# Altium PCB DAC8830V1.0.pcbdoc
Units mil, origin at the board's own origin, x right, y up, seen from the top; angles counter-clockwise.
Board outline 6000 x 4000 mil, 2 copper layers (Top Layer, Bottom Layer); 32 components, 18 nets, 91 pads, 83 vias.
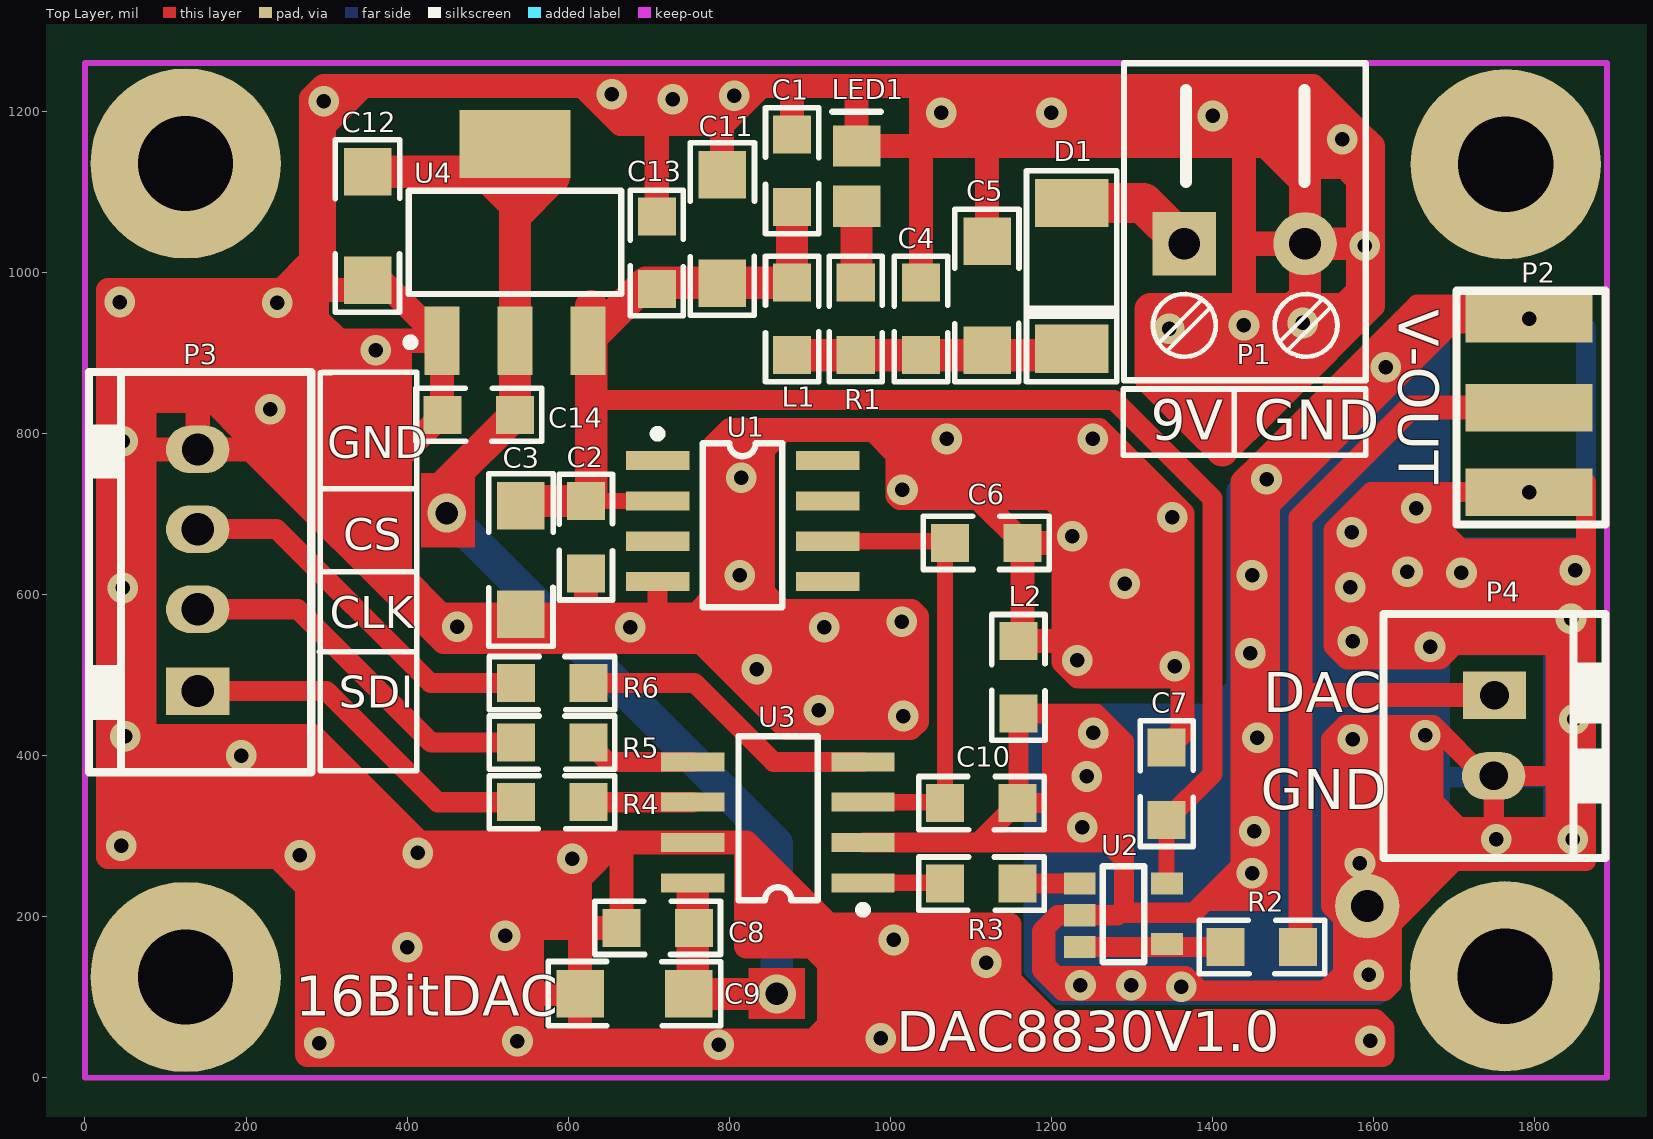
[diagram p0: Top Layer view]
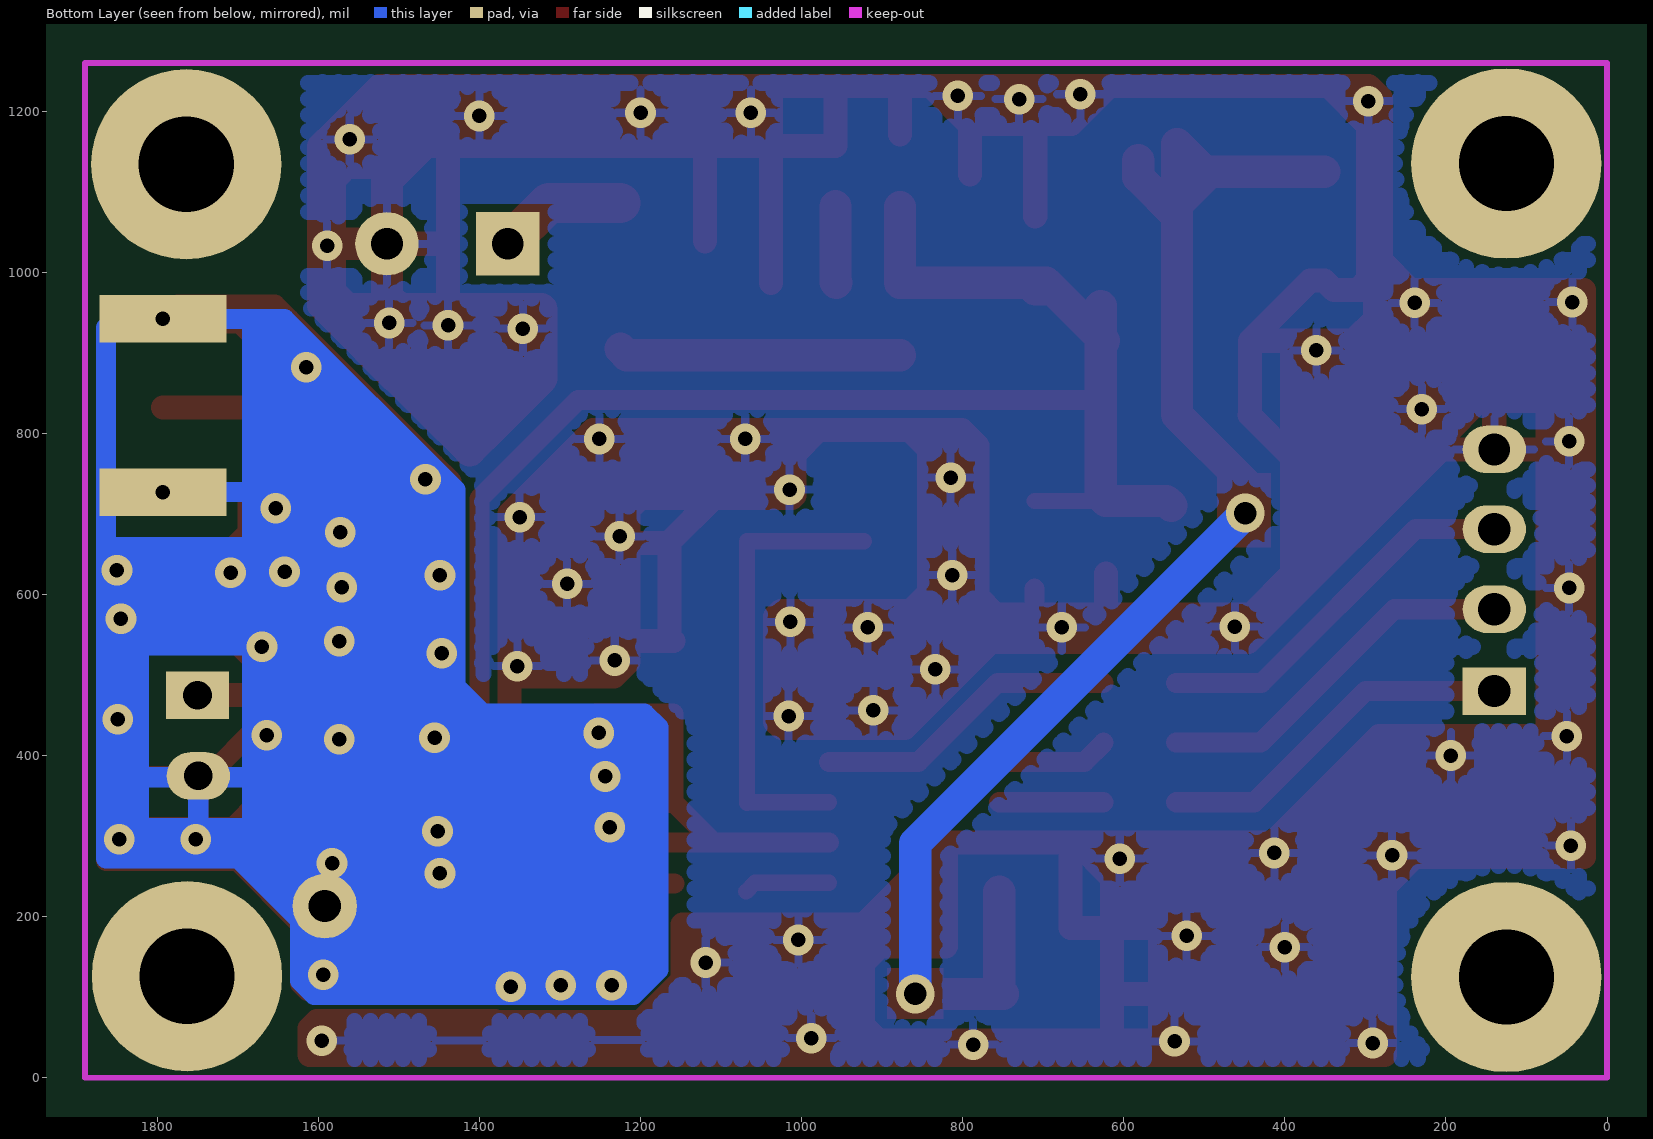
[diagram p1: Bottom Layer view, seen from below]

## Layer stack, top to bottom
Top Solder: solder mask 0.4, Solder Resist, Dk 3.5
Top Layer: signal copper 1.4
Dielectric 1: dielectric 12.6, FR-4, Dk 4.8
Bottom Layer: signal copper 1.4
Bottom Solder: solder mask 0.4, Solder Resist, Dk 3.5

## Board outline
-1385,-1985 4615,-1985 4615,2015 -1385,2015

## Design rules (kind name [scope] priority, off if disabled: settings)
Clearance [All] p1: gap=10
ComponentClearance [All] p1 off: gap=10 collisioncheckmode=3 verticalgap=10 showdistances=FALSE
PolygonConnect [All] p1: connectstyle=Relief reliefconductorwidth=10 reliefentries=4 polygonreliefangle="90 Angle" airgapwidth=10
RoutingVias [All] p1: holewidth=28 width=50 viastyle="Through Hole" minholewidth=28 minwidth=50 maxholewidth=28 maxwidth=50
SilkToBoardRegionClearance [All] p1 off:
SilkToSilkClearance [All] p1 off: silktosilkclearance=10
SilkToSolderMaskClearance [IsPad] p1 off: minsilkscreentomaskgap=10 clearancetoexposedcopper=TRUE
SolderMaskExpansion [All] p1: expansion=4
Width [All] p1: maxlimit=100 minlimit=10 preferedwidth=10 minimp=50.000000 maximp=50.000000 favimp=50.000000
26 further rules are at their usual default settings.

## Components (designator, comment, footprint, x,y, rotation, side; value= is the part's Value field where it differs from the comment)
C1 "0.1uF" 0805 878,1081 r90 top
C2 "0.1u" 0805 622,716 r270 top
C3 "10u/16V" 1206 541,710 r270 top
C4 "0.1uF" 0805 1038,987 r270 top
C5 "10u/25V" 1206 1120,903.6 r90 top
C6 "0.1u" 0805 1074,664 r0 top
C7 "0.1uF" 0805 1343,410 r270 top
C8 "0.1uF" 0805 666,186 r0 top
C9 "10uF" 1206 615,104 r0 top
C10 "0.1u" 0805 1068,341 r0 top
C11 "10uF" 1206 791,1121 r270 top
C12 "10uF" 1206 351,990 r90 top
C13 "0.1uF" 0805 710,1069 r270 top
C14 "0.1uF" 0805 444,823 r0 top
D1 "1N5817" "二极管 贴片 2010" 1225,1086 r270 top
L1 "磁珠" 0805 878,897 r90 top
L2 "磁珠" 0805 1159,542 r270 top
LED1 "红色" LED0805 958,1082 r90 top
P1 "KF127S-3.81-2P" KF127S-3.81-2P 1290,866 r0 top
P2 "SMA" "天线座 50ohm 侧卧" 1793,832 r180 top
P3 "XH2.54-4" VH2.54_4 140,480 r270 top
P4 "XH2.54-2" VH2.54_2 1750,475 r90 top
R1 "10K" 0805 957,987 r270 top
R2 "0" 0805 1416.26,162.26 r0 top
R3 "0" 0805 1158,241 r180 top
R4 "10" 0805 625,342 r180 top
R5 "10" 0805 625,416 r180 top
R6 "10" 0805 625,490 r180 top
U1 "REF02" SOIC8 711,766 r270 top
U2 "LMV321" SOT23-5 1235,241 r0 top
U3 "DAC8830" soic8 966,242 r90 top
U4 "SPX1117M3-5.0" SOT223 443,915 r0 top

## Footprints (in the part's own frame and the unit in brackets; to place one, negate y for a bottom-side part, rotate by r counter-clockwise, add the part's x,y. Pads: shape width x height; smd on the part's side, far side on the other; paste and mask are expansions set on the pad)
0805 [mm]
  rect 1.2x1.2 smd: 1(0,0) 2(2.286,0)
  silkscreen extent -0.84,-0.84 3.12,0.84
1206 [mm]
  rect 1.5x1.5 smd: 1(-0.005,0) 2(3.424,0)
  silkscreen extent -1.01,-1.01 4.43,1.02
KF127S-3.81-2P [mm]
  rect 2x2 hole 1: 1(1.9,4.3)
  round 2 hole 1: 2(5.71,4.3)
  silkscreen extent 0,0 7.62,10
LED0805 [mm] "Chip Capacitor; Body 2.0 x 1.2 mm (LxW typ)"
  rect 1.3x1.5 smd: 1(0,0) 2(1.9,0)
  silkscreen extent 2.98,-0.76 2.98,0.76
SOIC8 [mm]
  rect 0.6x2 smd: 1(0,0) 2(1.27,0) 3(2.54,0) 4(3.81,0) 5(3.81,5.367) 6(2.54,5.367) 7(1.27,5.367) 8(0,5.367)
  silkscreen extent -0.97,-0.12 4.62,3.93
soic8 [mm]
  rect 0.6x2 smd: 1(0,0) 2(1.27,0) 3(2.54,0) 4(3.81,0) 5(3.81,5.367) 6(2.54,5.367) 7(1.27,5.367) 8(0,5.367)
  silkscreen extent -0.97,-0.13 4.62,3.93
SOT23-5 [mm]
  rect 1x0.7 smd: 1(0,0) 2(-0.002,-1) 3(-0.001,-2) 4(2.753,-1.91) 5(2.754,0)
  silkscreen extent 0.73,-2.48 2.04,0.55
SOT223 [mm] "SOT-223/SC-73; 4 Leads; Body 6.7 x 7.3 mm, inc. leads (LxW max)"
  rect 1.1x2.15 smd: 1(0.011,-0.001) 2(2.311,-0.001) 3(4.611,-0.001)
  rect 3.5x2.15 smd: 4(2.311,6.199)
  silkscreen extent -1.11,-0.18 5.66,4.72
VH2.54_2 [mm]
  rect 1.5x2 hole 0.9: 1(0,0)
  oval 1.5x2 hole 0.9: 2(-2.55,0.025)
  silkscreen extent -5.14,-3.51 2.56,3.51
VH2.54_4 [mm]
  rect 1.5x2 hole 1.016: 1(0,0)
  oval 1.5x2 hole 1.016: 2(-2.58,0) 3(-5.105,0)
  oval 1.5x2 hole 1: 4(-7.62,0)
  silkscreen extent -10.06,-3.43 2.56,3.58
"二极管 贴片 2010" [mil]
  rect 60x91 smd: 1(0,0) 2(181,0)
  silkscreen extent -40,-56 222,56
"天线座 50ohm 侧卧" [mm]
  rect 4x1.5 smd: 1(0,0) 2(0,2.667) 2(0,-2.794)
  rect 4x1.5 smd far side: 2(0,2.667) 2(0,-2.794)
  silkscreen extent -2.41,-3.68 2.29,3.68

## Part data
C1 C2 C4 C6 C7 C8 C9 C10 C11 C12 C13 C14: library part "电容 贴片 0805"
C3 C5: library part "电容 贴片 铝电解100u/25V"
D1: library part "二极管 贴片1N5817"
LED1: library part "二极管 贴片发光 0805"
P1: library part "连接件 KF127S-3.81-2P"
P2: library part "联结件 天线座 SMA"
P3: library part "连接件 XH2.54-4"
P4: library part "连接件 XH2.54-2"
R1 R2 R3 R4 R5 R6: library part "电阻 贴片 0805"
U1: library part "贴片芯片 ADR02"
U2: library part "贴片芯片 LMV321"
U3: library part "贴片芯片 DAC8830"
U4: library part "贴片芯片 SPX1117M3-5.0", "LDO"

## Free pads (board coordinates)
  round 236.22 hole 118.11: 0(125,125) 0(125,1135) 0(1763,126) 0(1764,1134)
  round 80 hole 40: 1(1592,213)

## Via types
v1: diameter 38, hole 18, Top Layer to Bottom Layer, 81 vias
v2: diameter 48, hole 28, Top Layer to Bottom Layer, 2 vias

## Nets (pads, with @x,y where several pads share a name; then routed paths per layer and width w, separated by ;. In a path a pad name is that pad's centre, name@x,y a point inside that pad or via, vN(x,y) a via of type N, cw(c..) or ccw(c..) an arc to the next point about the centre after c; other vN are vias at no path point)
5V: C8.2 C9.2 C12.2 C14.2 U3.8 U4.2 U4.4 | length 1842.1
  Top Layer w40: C12.2 U4.4@493.2,1124.8 ; v2(449,701) 449,738 C14.2 U4.2 534,1070 ; U4.4@582,1139 582,1118 534,1070 ; U3.8@754.7,231 754.7,108.9 C9.2 v2(859,104) ; U4.4@493.2,1124.8 534,1084 ; U4.4@493.2,1124.8 499.76,1124.8 U4.4 534,1084 ; 534,1070 534,1084
  Bottom Layer w40: v2(449,701) 859,291 v2(859,104)
9V: C1.1 C2.1 C3.1 C7.2 C11.2 C13.2 L1.2 U1.2 U2.5 U4.3 | length 2140.4
  Top Layer w20: C2.1 U1.2 ; C7.2 1343,241.43 U2.5
  Top Layer w25: 628.55,840 630.05,841.5 1277.5,841.5 1400,719 1400,377 C7.2
  Top Layer w40: C3.1 546.8,716 C2.1 628.55,722.55 628.55,957.95 ; U4.3 C13.2@688.6,979 ; C13.2 C13.2@688.6,979 ; C1.1 L1.2 696.6,987 C13.2@688.6,979
AGND: C10.2 L2.2 P2.2 P4.2 pad.1 U2.2 U3.2 | length 13832.9
  Top Layer w25: U3.2 1109,292 ; 1263.97,125.98 1205.96,125.98 ; 1263.99,126 1367,126 1385,108 ; v1(1793,727) 1688,727 ; P2.2@1863.76,739 1863.76,657 ; 1109,292 1207,292 ; 1109,292 C10.2 ; C10.2 1201,341 ; C10.2 1159,342 L2.2 1201,452 ; 1188,182 1192.78,177.22 1192.78,139.16 1205.96,125.98 ; 1188,182 1207.63,201.63 U2.2 1281.63,201.63 1284.72,204.72 ; 1188,182 1188,134 1196.02,125.98 ; 1196.02,125.98 1205.96,125.98 ; 1196.02,125.98 1214,108 1385,108 ; 1201,341 1289,341 1290,342 ; 1201,341 1201,452 ; 1201,341 1201,298 1207,292 ; 1201,452 1255,452 1290,417 1290,342 ; 1207,292 1269,292 1290,271 ; 1284.72,204.72 1376.72,204.72 1391.5,219.5 ; 1284.72,204.72 1290,210 1290,271 ; 1290,271 1290,342 ; 1385,108 1540,108 ; 1391.5,219.5 1409,237 ; 1391.5,219.5 1464,219.5 1471.5,227 ; 1409,237 v1@1435,263 ; 1409,237 1461.5,237 1471.5,227 ; v1@1435,263 1435,741 1455.75,761.75 ; v1@1435,263 1440,258 v1@1455.75,258 ; v1@1455.75,258 v1(1455.75,422) 1455.75,719 ; v1@1455.75,258 1471.5,258 ; 1455.75,719 1673,936.25 ; 1455.75,719 v1@1455.75,735 ; v1@1455.75,735 1654,933.25 1654,942 ; v1@1455.75,735 1455.75,761.75 ; 1455.75,761.75 1636,942 ; 1471.5,227 1471.5,258 ; 1471.5,258 1471.5,710.53 1697.22,936.25 ; 1540,108 1614,108 1622.39,116.39 pad.1@1622.39,190.39 ; 1540,108 1562,130 ; 1562,130 pad.1@1622.39,190.39 ; 1562,130 1562,198 1547,213 1547,420 1564.5,437.5 v1@1674,437.5 ; pad.1@1622.39,190.39 1701,269 1797,269 ; 1636,942 1654,960 1775,960 v1(1793,942) ; 1636,942 1654,942 ; 1654,942 1673,942 ; 1673,936.25 1697.22,936.25 ; 1673,936.25 1673,942 ; 1673,942 1702.97,942 ; v1@1674,437.5 1674,343 1706,311 v1@1749,311 ; v1@1674,437.5 1736.89,374.61 P4.2 ; 1688,727 1597,727 1550,680 1550,536 1567,519 1682,519 1700,537 1826,537 ; 1688,727 1688,677 1708,657 1826,657 ; 1697.22,936.25 1702.97,942 ; 1697.22,936.25 1787.25,936.25 v1(1793,942) ; 1702.97,942 v1(1793,942) ; v1@1749,311 1826,311 ; v1@1749.02,311.02 P4.2 ; P4.2 1822.61,374.61 1826,378 ; 1797,269 1820,269 ; 1797,269 1826,298 1826,311 ; 1820,269 1863.76,269 1863.76,534 ; 1820,269 v1(1847,296) 1847,537 ; 1826,311 1826,378 ; 1826,378 1826,537 ; 1826,537 1826,657 ; 1826,537 1847,537 ; 1826,657 1847,657 ; 1847,537 1847,657 ; 1847,537 1860.76,537 1863.76,534 ; 1847,657 1863.76,657 ; 1863.76,534 1863.76,657
  Bottom Layer w25: 1664,373 1682.5,373 ; P4.2 P4.2@1749.02,373 ; v1(1752,296) 1749.02,298.98 v1@1749.02,310 ; v1(1793,727) 1689.5,727 1682.5,720 ; v1(1793,942) 1674,942 ; 1823,545 1823,373 ; 1842,543 1842,373 ; P2.2@1863.76,931 1863.76,372 ; 1674,942 1642,942 1430,730 1430,486 1396,452 1195,452 1178,435 1178,134 1209,103 1605.39,103 1622.39,120 1622.39,195.39 1682.5,255.5 ; 1674,942 1682.5,933.5 1682.5,720 ; 1682.5,255.5 1682.5,291 ; 1682.5,255.5 1699,272 1836,272 ; 1682.5,291 v1@1842,291 ; 1682.5,291 1682.5,310 ; 1682.5,310 v1@1749.02,310 ; 1682.5,310 1682.5,373 ; 1682.5,373 1682.5,720 ; 1682.5,373 P4.2@1749.02,373 ; v1@1749.02,310 1817,310 ; v1@1749.02,310 P4.2@1749.02,373 ; P4.2@1749.02,373 1823,373 ; 1817,310 1833,310 v1@1842,301 ; 1817,310 1823,316 1823,373 ; 1823,373 1842,373 ; 1836,272 1863.76,272 1863.76,372 ; 1836,272 1842,278 v1@1842,291 ; v1@1842,291 v1@1842,301 ; v1@1842,291 v1(1847,296) v1@1842,301 ; v1@1842,301 1842,373 ; 1842,373 1862.76,373 1863.76,372
  other v1: 1361,113 1236,115 1299,115 1594,128 1449,254 1583,266 1452,306 1238,311 1244,374 1574,420 1664,425 1252,428 1849,445 1447,527 1670,535 1574,542 1845,570 1571,609 1449,624 1709,627 1642,628 1850,630 1573,677 1653,707 1467,743 1615,882
CS: P3.3 R6.2 | length 474.1
  Top Layer w25: P3.3 238,681 429,490 R6.2
GND1: C1.2 C2.2 C3.2 C4.1 C5.2 C6.2 C7.1 C8.1 C9.1 C11.1 C12.1 C13.1 C14.1 L2.1 LED1.2 P1.2 P3.4 U1.4 U3.7 U4.1 | length 22784.1
  Top Layer w25: 711,579.2 U1.4@711,607
  Top Layer w30: 394.5,604.5 391,608 ; C2.2 622,578.2 625,575.2 ; C13.1 710,1184 ; 711,579.2 715,575.2 ; C11.1 791,1184 ; C1.2 878,1228.34 881,1231.34 ; 905,46 904.5,46 ; 911,34.5 905,28.5 ; 911,52 1602,52 1611,61 ; 913,163 821,163 821,292 ; 924,139.5 924,65.5 904.5,46 ; C4.1 1038,1156.8 ; C5.2 1120,1156.8 ; C7.1 1362.5,429.5 v1@1362.5,498 ; 1441,954 1439,956 1439,1042 ; 1493,1226.34 1488,1231.34 ; 1506.98,866.02 1580.5,939.53 ; P1.2 1445.71,1035.29 1439,1042 ; 1514.8,1107 1465,1156.8 1439,1156.8 ; v1@28.5,291 v1@29.5,292 ; v1@28.5,291 28.5,423 ; v1@28.5,291 28.5,274 77,274 ; 28.5,423 28.5,778 ; 28.5,423 29.5,424 v1@53,424 ; 28.5,778 28.5,978 v1@53,978 ; 28.5,778 30.5,780 v1@53,780 ; v1@29.5,292 74,292 ; v1@29.5,292 53,315.5 v1@53,424 ; v1@53,424 74,424 ; v1@53,424 v1@53,780 ; v1@53,780 53,840 ; v1@53,780 74,780 ; 53,840 v1@53,978 ; 53,840 74,840 ; v1@53,978 74,978 ; 74,292 v1@415,292 ; 74,292 74,424 ; 74,292 74,277 77,274 ; 74,424 283,424 v1@415,292 ; 74,424 74,780 ; 74,780 74,840 ; 74,780 P3.4 ; 74,840 74,978 ; 74,840 140,840 ; 74,978 146,978 ; 77,274 239,274 276,237 v1@276,50 ; P3.4 206,780 ; P3.4 140,840 ; 140,840 140,972 146,978 ; 140,840 159,840 201,798 ; 146,978 v1@244,978 ; 201,798 219,780 ; 201,798 201,785 206,780 ; 206,780 432,554 ; 206,780 219,780 ; 219,780 391,608 ; v1@244,978 288,978 ; v1@244,978 281,1015 ; v1@276,50 276,28.5 560,28.5 ; v1@276,50 280,46 v1@555,46 ; 281,1015 281,1197 ; 281,1015 281,1007 296.47,991.53 ; 281,1197 281,1216.34 296,1231.34 315.34,1231.34 ; 281,1197 v1(296.47,1212.47) ; 288,978 296.47,986.47 296.47,991.53 ; 288,978 310,978 ; 288,978 288,942 315.05,914.95 391,914.95 ; 296.47,991.53 296.47,1181.81 ; 296.47,991.53 310,978 ; 296.47,1181.81 346,1231.34 ; 296.47,1181.81 v1(296.47,1212.47) ; v1(296.47,1212.47) 315.34,1231.34 ; 310,978 339.2,978 C12.1 368.6,989.8 U4.1 ; 315.34,1231.34 346,1231.34 ; 346,1231.34 617.66,1231.34 ; 377.1,640.1 391,626.2 ; 377.1,640.1 356,661.2 356,735 377.1,756.1 ; 377.1,640.1 377.1,756.1 ; 377.1,756.1 391,770 ; 391,608 423.8,575.2 442,575.2 ; 391,608 391,626.2 ; 391,626.2 442,575.2 ; 391,626.2 391,770 ; 391,770 C14.1 443.45,823.55 U4.1 ; 391,770 391,914.95 ; 391,914.95 U4.1 ; v1@415,292 555,292 ; 432,554 752,554 ; 432,554 445,541 740,541 ; 442,575.2 C3.2 625,575.2 ; v1@555,46 555,109 ; v1@555,46 555,33.5 560,28.5 ; v1@555,46 614.8,46 ; 555,109 555,193 ; 555,109 560,104 C9.1 ; 555,193 555,292 ; 555,193 562,186 ; 555,292 574,292 ; 560,28.5 620,28.5 ; 562,186 593,186 ; 562,186 574,198 574,292 ; 574,292 593,292 ; 593,186 614.8,186 ; 593,186 593,292 ; 593,292 610,292 ; 610,292 658.8,292 ; 610,292 614.8,287.2 614.8,248 ; 614.8,46 904.5,46 ; 614.8,46 C9.1 ; 614.8,46 614.8,33.7 620,28.5 ; C9.1 614.8,186 ; 614.8,186 614.8,248 ; 614.8,186 C8.1 666,285 659,292 ; 614.8,248 658.8,292 ; 617.66,1231.34 707,1231.34 ; 617.66,1231.34 v1@640,1209 ; 620,28.5 905,28.5 ; 625,575.2 715,575.2 ; v1@640,1209 665,1184 710,1184 ; v1@640,1209 710,1209 ; 658.8,292 659,292 ; 659,292 U3.7 821,292 ; 707,1231.34 786,1231.34 ; 707,1231.34 710,1228.34 710,1209 ; 710,1184 791,1184 ; 710,1184 710,1209 ; 710,1209 v1@791,1209 ; 715,575.2 730.8,575.2 ; 730.8,575.2 752,554 ; 730.8,575.2 759.2,575.2 ; 740,541 765,541 ; 740,541 752.5,553.5 ; 752,554 752.5,553.5 ; 752.5,553.5 765,541 ; 752.5,553.5 767.5,568.5 ; 759.2,575.2 760.8,575.2 767.5,568.5 ; 759.2,575.2 782,598 ; 765,541 782,524 ; 767.5,568.5 782,554 ; 782,524 872,434 1025,434 1033,442 1033,572.38 1026.19,579.19 864.81,579.19 842,602 842,780 866,804 ; 782,524 782,554 ; 782,554 782,598 ; 782,598 782,785 801,804 866,804 ; 786,1231.34 840,1231.34 ; 786,1231.34 791,1226.34 v1@791,1209 ; 791,1184 v1@791,1209 ; 791,1184 792.66,1184 v1@817.66,1209 ; v1@791,1209 v1@817.66,1209 ; v1@817.66,1209 840,1231.34 ; 821,292 923,190 1128,190 ; 840,1231.34 881,1231.34 ; 866,804 979,804 ; 881,1231.34 958,1231.34 ; 905,28.5 1611,28.5 1611,61 ; 958,1231.34 1037,1231.34 ; 958,1231.34 LED1.2 1038,1156.8 ; 979,804 1009,804 ; 979,804 1009,774 ; 1009,774 1009,804 ; 1009,774 1009,723 1012,720 1109,720 ; 1009,804 1259,804 1362.5,700.5 v1@1362.5,498 ; 1037,1231.34 1113,1231.34 ; 1037,1231.34 1038,1230.34 1038,1156.8 ; 1038,1156.8 1120,1156.8 ; 1109,720 1200,720 1215,705 v1@1215,662 ; 1109,720 1164,665 C6.2 ; 1113,1231.34 1488,1231.34 ; 1113,1231.34 1120,1224.34 1120,1156.8 ; 1120,1156.8 1439,1156.8 ; 1128,190 1148,190 1148,120.97 ; 1128,190 1128,140.97 1148,120.97 ; 1148,120.97 1199.97,69 1379.23,69 1380.73,70.5 1601.5,70.5 1611,61 ; C6.2 1213,664 v1@1215,662 ; C6.2 1164,547 L2.1 1208,542 1215,549 ; 1215,549 v1@1215,662 ; 1215,549 1215,516 1233,498 v1@1362.5,498 ; 1439,1042 1439,1156.8 ; 1488,1231.34 1524.66,1231.34 1580.5,1175.5 ; 1580.5,939.53 1580.5,969.89 1580.5,1035.29 1580.5,1121.5 1580.5,1144 1580.5,1175.5 ; 1580.5,939.53 1599,958.03 1599,1157 1580.5,1175.5
  Top Layer w40: 1418,816 1410,808 1383,808 ; 1480,1197 1505,1197 1514.8,1187.2 ; 1493,1226.34 1514.8,1204.54 ; 1506,961 1499,954 ; 1580.5,969.89 1564.61,954 ; v1@1580.5,1035.29 P1.2 ; 1580.5,1121.5 1566,1136 ; 1580.5,1144 1519.96,1204.54 1514.8,1204.54 ; 1323,868 1354.5,836.5 ; 1323,868 1473,868 1487,854 ; 1323,868 1323,893 ; 1323,893 1323,922 ; 1323,893 1503.61,893 ; 1323,922 1323,954 1441,954 1499,954 ; 1323,922 1513.8,922 v1@1514.8,923 ; 1354.5,836.5 1383,808 ; 1354.5,836.5 1456.5,836.5 1463,830 ; 1383,808 1412,779 1463,830 ; 1463,830 1487,854 ; 1487,854 1514.8,881.8 ; 1499,954 v1@1514.8,954 ; 1503.61,893 1514.8,904.2 ; 1503.61,893 1514.8,881.8 ; 1514.8,881.8 1514.8,904.2 ; 1514.8,904.2 1564.61,954 ; 1514.8,904.2 v1@1514.8,923 ; v1@1514.8,923 v1@1514.8,954 ; v1@1514.8,954 P1.2 ; v1@1514.8,954 1564.61,954 ; P1.2 1514.8,1107 1514.8,1136 ; 1514.8,1136 1514.8,1187.2 ; 1514.8,1136 1566,1136 ; 1514.8,1187.2 1566,1136 ; 1514.8,1187.2 1514.8,1204.54
  other v1: 787,41 291,43 537,45 1596,46 988,49 1119,143 400,162 1004,171 522,176 605,272 267,276 413,279 45,288 194,400 50,424 1016,449 911,456 834,507 1353,511 1232,518 677,559 918,559 462,560 1014,566 47,608 1291,613 813,624 1226,672 1350,696 1015,730 815,745 47,790 1070,793 1251,793 230,830 361,903 1346,930 1439,934 1512,937 239,962 43,963 1589,1033 1561,1165 1400,1194 1063,1198 1200,1198 730,1215 806,1219 654,1221
NetC4_2: C4.2 C5.1 D1.2 L1.1 R1.2 | length 350.3
  Top Layer w40: L1.1 R1.2 C4.2 1217,897 D1.2
NetD1_1: D1.1 P1.1 | length 160.8
  Top Layer w50: D1.1 1314.09,1086 P1.1
NetLED1_1: LED1.1 R1.1 | length 95.4
  Top Layer w40: R1.1 958,988 LED1.1
NetP2_1: P2.1 P4.1 R2.2 | length 1112.6
  Top Layer w30: R2.2@1509,165 1509,473 ; P4.1 1511,475 1509,473 ; P2.1 1646,832 1509,695 1509,473
NetR2_1: R2.1 U2.3 U2.4 | length 185.2
  Top Layer w25: U2.3 R2.1 R2.1@1419,165
NetR3_1: R3.1 U2.1 | length 77
  Top Layer w25: R3.1 U2.1
NetR3_2: R3.2 U3.1 | length 107.6
  Top Layer w20: U3.1 1058,242 R3.2@1069,231
NetR4_1: R4.1 U3.6 | length 129.7
  Top Layer w25: R4.1 U3.6
NetR5_1: R5.1 U3.5 | length 139.6
  Top Layer w25: R5.1 649,392 U3.5
NetR6_1: R6.1 U3.4 | length 381.6
  Top Layer w25: R6.1 757,490 855,392 U3.4
SCLK: P3.2 R5.2 | length 463.6
  Top Layer w25: P3.2 264.43,581.57 430,416 R5.2
SDI: P3.1 R4.2 | length 452.2
  Top Layer w25: P3.1 300,480 438,342 R4.2
VREF5V: C6.1 C10.1 U1.6 U3.3 | length 573.1
  Top Layer w20: U1.6 1068,666 C10.1 1067,342 U3.3
pads on no net: U1.1 U1.3 U1.5 U1.7 U1.8

## Polygon pours and split planes (outlines as drawn)
GND1 on Bottom Layer "Bottom Layer-No Net" (hatched 90Degree grid 20 track 20, remove dead copper, pour order 2): 0,1259.84 1612,1259.84 1613,1258.84 1613,963 1613,957 1410,754 1397,741 1397,501 1194,501 1136,443 1133,440 1133,132 1194,71 1618,71 1622,67 1622,22 1600,0 0,0

## Keep-outs
Keep-Out Layer:
  lines w7: 0,0 0,1259.84 1889.76,1259.84 1889.76,0 0,0

## Other copper
Top Layer:
  rectangle net 5V: 417,658 484,751
  rectangle net 5V: 824,73 894,136
  region net AGND: 1255,452 1290,417 1290,292 1201,292 1201,452
  region net GND1: 898,807 804,807 782,785 782,524 872,434 1025,434 1033,442 1033,572.38 1026.19,579.19 864.81,579.19 864.81,590.19 842,613 842,780 866,804
  region net GND1: 1009,804 1259,804 1362.5,700.5 1362.5,498 1233,498 1215,516 1215,705 1200,720 1012,720
  region net GND1: 1037,1231.34 1042,1226.34 1493,1226.34 1524,1195.34 1524,1113 1508.8,1113 1465,1156.8 1038,1156.8
  region net GND1: 66,975 69,978 288,978 288,942 315.05,914.95 377.95,914.95 378,915 386,907 386,765 347,726 347,658 341,658 159,840 74,840
  region net GND1: 74,424 275,424 275,421 398,298 66,298
  region net GND1: 235,292 555,292 555,46 280,46 280,233 223,290
  region net GND1: 821,292 828,292 928,192 1127,192 1127,141.97 1148,120.97 1148,121 1209,60 1202,53 911,53 911,134 891,154 830,154
  region net AGND: 1564.5,437.5 1674,437.5 1674,343 1706,311 1826,311 1829,308 1829,270 1702,270 1622.39,190.39 1622.39,116.39 1614,108 1558,108 1558,202 1547,213 1547,420
  region net AGND: 1595,727 1553,685 1553,528 1558,528 1567,519 1682,519 1700,537 1826,537 1826,657 1708,657 1688,677 1688,727
Bottom Layer:
  rectangle net AGND: 1665,524 1869,671
  region net AGND: 1682.5,933.5 1682.5,276.5 1688,271 1628,211 1628,125.61 1605.39,103 1209,103 1178,134 1178,435 1196,453 1397,453 1430,486 1430,730 1642,942

## Silkscreen, mask and mechanical layers (free items; w line width, h text height)
Top Overlay:
  lines w7: 291,529 412,529 ; 292,628 411,628 ; 293,731 412,731 412,732 ; 295,876 412,876 412,381 292,381 292,875 306,875 ; 1427,773 1427,855 ; 1289,773 1289,855 1291,855 1590,855 1590,773 1289,773
  text "V-OUT" at 1631,954 h50 r270
  text "9V" at 1323,792 h50
  text "GND" at 1451,792 h50
  text "GND" at 301,769 h40
  text "CS" at 321,655 h40
  text "CLK" at 304,558 h40
  text "SDI" at 315,459 h40
  text "DAC" at 1463,454 h50
  text "GND" at 1460,333 h50
  text "16BitDAC" at 261,77 h50
  text "DAC8830V1.0" at 1007,33 h50
Mechanical 1:
  lines w7: 0,629.92 1889.76,629.92 1889.76,630 ; 944.88,0 944.88,1259.84